# Altium PCB VALVE_MODULE_20221227.PcbDoc (part 4 of 4)
Units mm, origin at the board's own origin, x right, y up, seen from the top; angles counter-clockwise.
Board outline 260.15 x 142.01 mm, 2 copper layers (Top Layer, Bottom Layer); 455 components, 212 nets, 1302 pads, 385 vias.
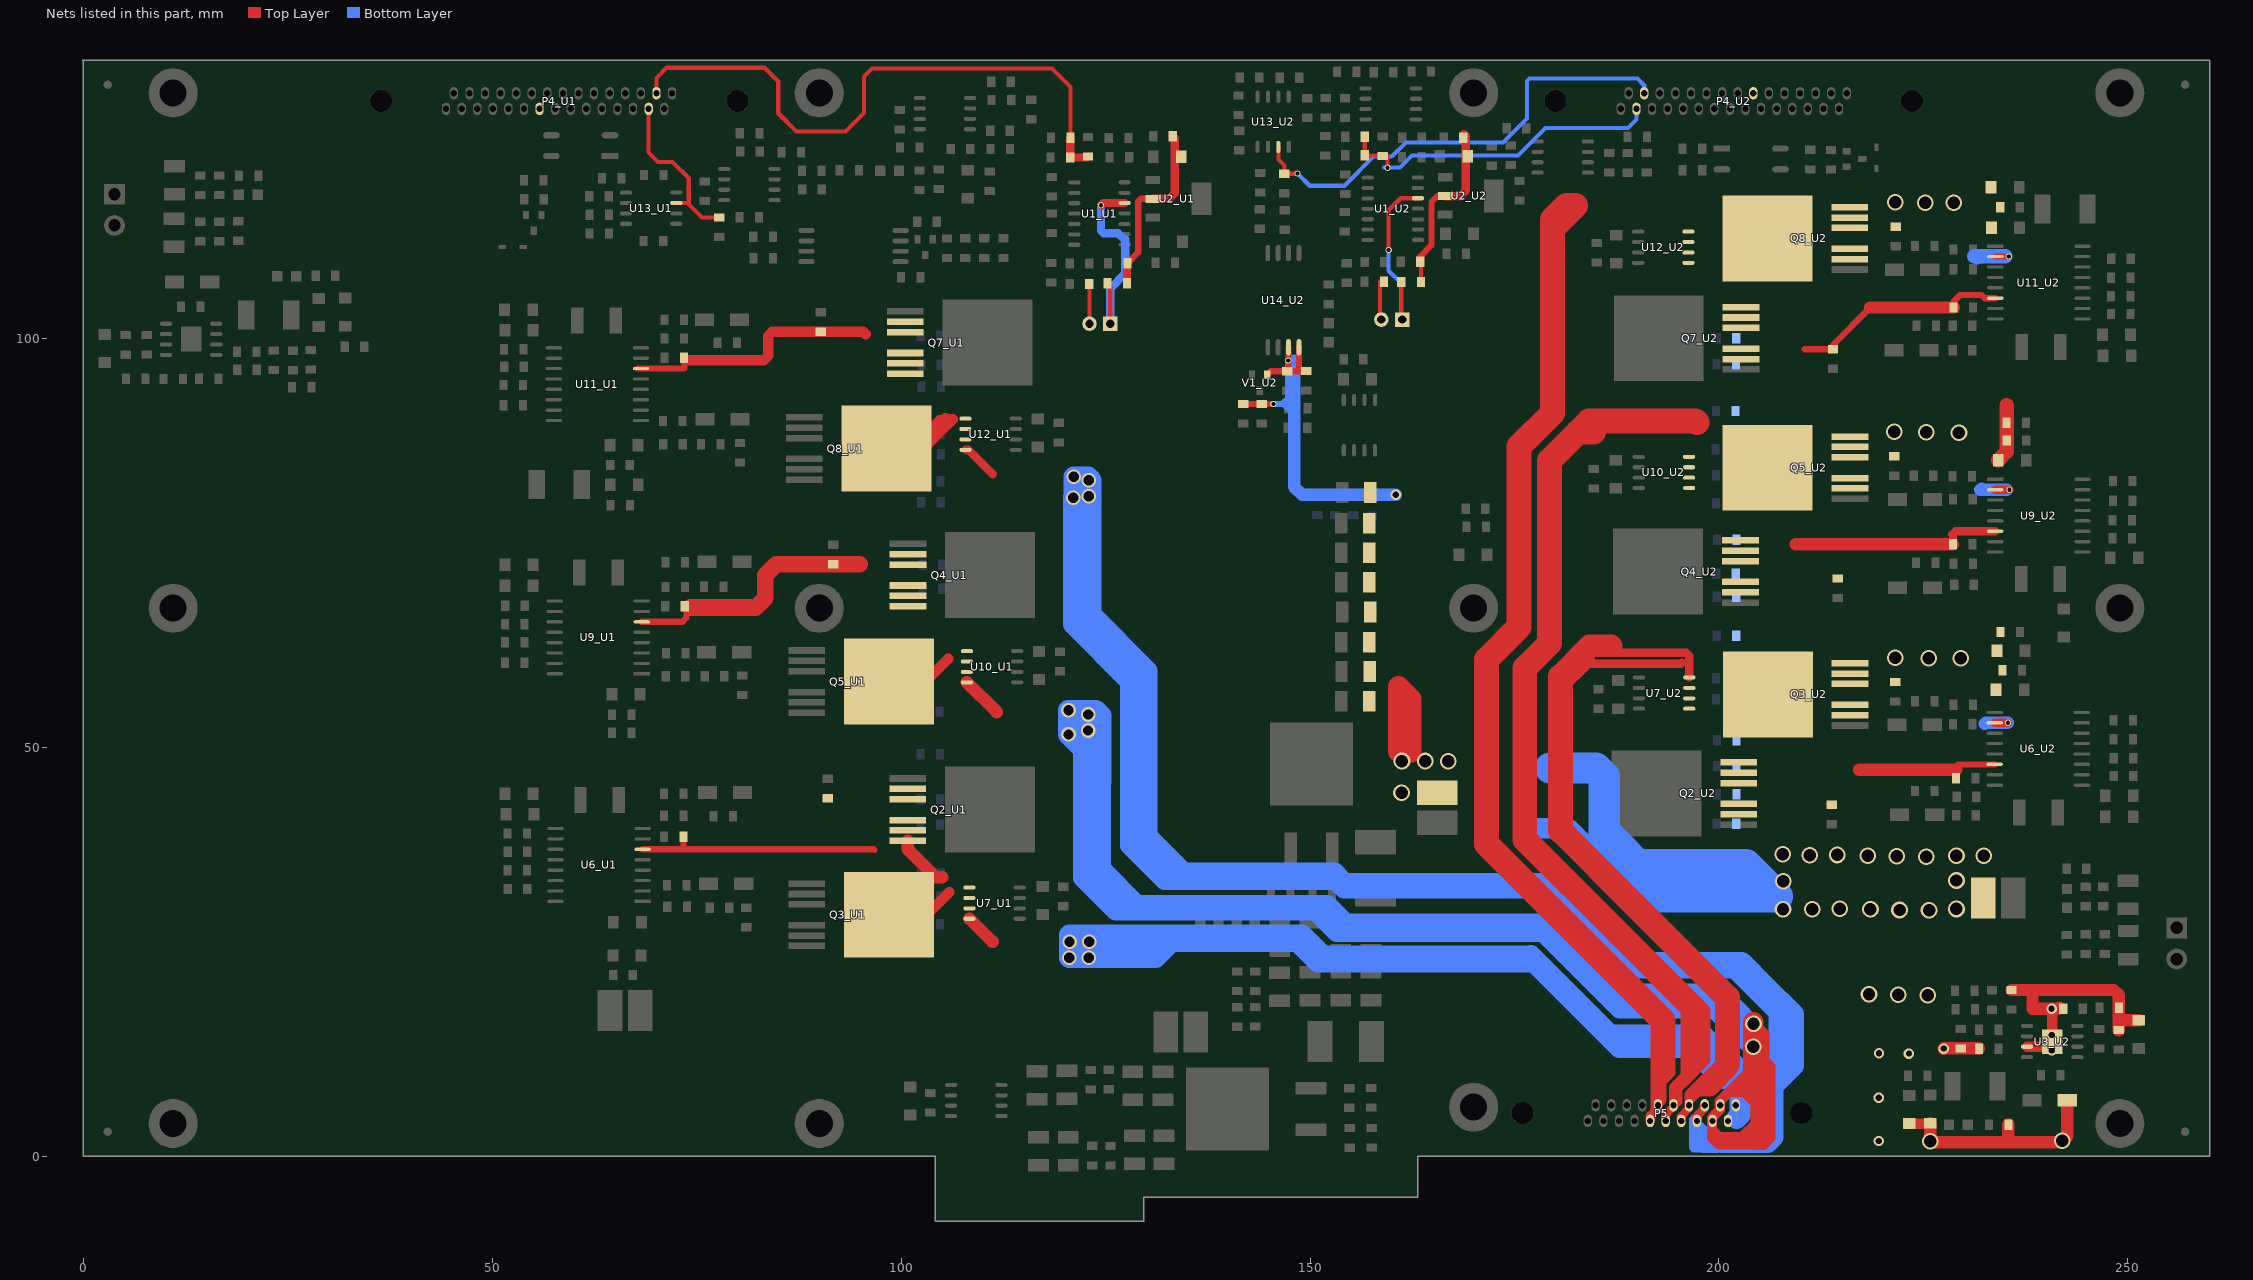
[diagram p4: the nets of this part, all layers, seen from the top]

## Via types
v1: diameter 0.762, hole 0.508, Top Layer to Bottom Layer, 142 vias
v2: diameter 2.032, hole 1.524, Top Layer to Bottom Layer, 140 vias
v3: diameter 1.27, hole 0.762, Top Layer to Bottom Layer, 77 vias
v4: diameter 1.27, hole 0.711, Top Layer to Bottom Layer, 14 vias
v5: diameter 1.778, hole 1.27, Top Layer to Bottom Layer, 12 vias

## Nets (pads, with @x,y where several pads share a name; then routed paths per layer and width w, separated by ;. In a path a pad name is that pad's centre, name@x,y a point inside that pad or via, vN(x,y) a via of type N, cw(c..) or ccw(c..) an arc to the next point about the centre after c; other vN are vias at no path point) (continued)
PGND_U2: C15_U2.2 C16_U2.2 C17_U2.2 C18_U2.2 C19_U2.2 C20_U2.2 C21_U2.2 C22_U2.2 C24_U2.2 C25_U2.1 C26_U2.1 C27_U2.1 C29_U2.1 C30_U2.1 C69_U2.1 C70_U2.2 C71_U2.2 C72_U2.2 C73_U2.2 C74_U2.2 C75_U2.2 C76_U2.2 C77_U2.2 C78_U2.2 C79_U2.2 C80_U2.2 C81_U2.2 C82_U2.2 C83_U2.2 C84_U2.2 C85_U2.2 C86_U2.2 C87_U2.2 C88_U2.2 C89_U2.2 C90_U2.2 C91_U2.2 C92_U2.2 C93_U2.2 C106_U2.2 C107_U2.2 C108_U2.2 C109_U2.2 C110_U2.2 C111_U2.2 C112_U2.2 C113_U2.2 D2_U2.1 Q3_U2.2 Q3_U2.3 Q3_U2.5 Q3_U2.6 Q3_U2.7 Q5_U2.2 Q5_U2.3 Q5_U2.5 Q5_U2.6 Q5_U2.7 Q8_U2.2 Q8_U2.3 Q8_U2.5 Q8_U2.6 Q8_U2.7 R16_U2.2 R21_U2.2 R22_U2.1 R24_U2.2 R25_U2.1 R37_U2.1 R54_U2.1 R68_U2.1 R76_U2.2 R80.2 U3_U2.7 U3_U2.9 U6_U2.2 U9_U2.2 U11_U2.2 U14_U2.3 U14_U2.4 V1_U2.1 | length 246.4
  Top Layer w0.762: C30_U2.1@141.859,91.948 C29_U2.1@144.12,91.948 145.517,91.948 145.542,91.973 v1(145.517,91.973) ; V1_U2.1@144.78,95.529 145.212,95.961 C69_U2.1@147.193,95.961 ; U14_U2.3@147.371,98.908 147.371,96.139 C69_U2.1@147.193,95.961 ; U14_U2.4@148.641,98.908 148.641,96.012 148.59,95.961 ; R76_U2.2@149.555,95.987 149.53,95.961 148.59,95.961 ; U11_U2.2@233.782,109.982 v1(235.433,109.982) ; C69_U2.1@147.193,95.961 148.59,95.961
  Top Layer w1.016: U6_U2.2@233.705,52.984 235.309,52.984 v1(235.32,52.995) ; U9_U2.2@233.782,81.483 v1(235.509,81.483)
  Top Layer w1.27: C22_U2.2@223.241,3.988 225.755,3.988 C21_U2.2@225.806,4.039 ; U3_U2.7@237.668,13.386 240.132,13.386 U3_U2.9@240.741,13.995 240.741,17.958 v3(240.665,18.034)
  Top Layer w1.524: C21_U2.2@225.806,4.039 225.806,1.829 225.933,1.702 235.356,1.702 ; v3(227.482,13.157) 227.508,13.183 R25_U2.1@229.54,13.183 231.75,13.183 C27_U2.1@231.775,13.157 ; R16_U2.2@235.382,3.861 235.382,1.727 235.356,1.702 ; R22_U2.1@235.763,20.32 237.922,20.32 ; C26_U2.1@241.605,18.161 241.478,18.034 v3(240.665,18.034) 238.328,18.034 238.328,19.914 237.922,20.32 ; D2_U2.1@242.57,6.858 242.57,2.438 241.833,1.702 235.356,1.702 ; C25_U2.1@248.869,15.418 248.869,16.535 ; C24_U2.2@251.333,16.612 248.945,16.612 248.869,16.535 ; 237.922,20.32 248.26,20.32 248.895,19.685 R24_U2.2@248.895,18.136 248.869,18.11 248.869,16.535
  Top Layer w1.778: C108_U2.2@234.137,85.09 235.204,86.157 235.204,91.796
  Top Layer w2.54: 160.807,49.479 160.807,57.429 162.331,55.905 162.331,49.378
  Bottom Layer w0.762: v1(145.517,91.973) 146.634,91.973 ; 148.057,90.627 146.71,91.973 ; 148.057,91.567 147.65,91.973 146.71,91.973 ; 148.057,97.257 148.031,97.282 v1(147.345,97.282) 147.345,92.685 146.634,91.973 ; 146.634,91.973 146.71,91.973
  Bottom Layer w1.524: 148.057,97.257 148.057,91.567 148.057,90.627 148.057,81.839 149.022,80.874 v3(160.477,80.874) ; 231.927,81.458 v1@235.204,81.458 ; 232.131,81.585 232.232,81.483 ; 232.512,52.883 232.624,52.995 v1(235.32,52.995)
  Bottom Layer w1.778: 231.216,110.033 234.975,110.033 ; 231.572,109.88 231.673,109.982
  Bottom Layer w2.54: 177.698,40.107 181.458,40.107 190.5,31.064 207.289,31.064
  Bottom Layer w3.81: 179.324,47.447 184.937,47.447 185.979,46.406 185.979,39.726 191.922,33.782 205.156,33.782 ; 190.043,35.662 203.276,35.662 207.162,31.775
  other v2: 225.831,1.829 241.986,1.88 225.501,19.685 221.894,19.736 218.338,19.812 225.679,30.048 222.072,30.099 207.823,30.175 218.516,30.175 211.404,30.201 229.032,30.226 214.782,30.251 207.848,33.63 229.032,33.706 225.349,36.627 221.742,36.678 229.032,36.728 218.186,36.754 232.359,36.754 211.074,36.779 214.452,36.83 207.797,36.906 161.188,44.45 166.878,48.285 161.239,48.311 164.109,48.311 225.654,60.858 229.54,60.858 221.564,60.96 229.337,88.468 225.349,88.519 221.412,88.57 225.222,116.561 228.702,116.561 221.564,116.611
  other v3: 219.532,1.854 219.532,7.137 223.215,12.548 219.558,12.573 240.69,12.929 240.69,14.834
PT1000_AN1_U1: P1_U1.2 R11_U1.1 | length 4.9
  Top Layer w0.508: R11_U1.1@123.012,106.629 123.038,106.604 P1_U1.2@123.038,101.778
PT1000_AN1_U2: P1_U2.2 R11_U2.1 | length 4.7
  Top Layer w0.508: R11_U2.1@158.547,106.909 158.547,102.464 P1_U2.2@158.725,102.286
PT1000_AP1_U1: P1_U1.1 R4_U1.2 U1_U1.12 | length 25.7
  Top Layer w0.508: R4_U1.2@125.247,106.731 125.578,106.401 P1_U1.1@125.578,101.778
  Top Layer w1.016: v1(124.435,116.256) 124.714,116.535 U1_U1.12@127.33,116.535
  Bottom Layer w1.016: v1(124.435,116.256) 124.435,113.182 124.79,112.827 126.543,112.827 127.254,112.116 127.406,112.116 127.406,107.925 125.578,106.096 P1_U1.1@125.578,101.778
PT1000_AP1_U2: P1_U2.1 R4_U2.2 U1_U2.12 | length 22.9
  Top Layer w0.508: v1(159.614,110.795) 159.614,115.646 161.087,117.119 U1_U2.12@163.195,117.119 ; R4_U2.2@161.163,106.883 161.163,102.387 P1_U2.1@161.265,102.286
  Bottom Layer w0.508: v1(159.614,110.795) 159.614,108.255 161.112,106.756 161.112,102.438 P1_U2.1@161.265,102.286
TEMP_U1: C12_U1.1 P4_U1.29 R5_U1.2 R9_U1.2 | length 76.1
  Top Layer w0.508: P4_U1.29@70.091,129.952 70.091,131.838 71.323,133.071 83.312,133.071 84.988,131.394 84.988,127.508 87.198,125.298 93.193,125.298 95.453,127.559 95.453,131.978 96.444,132.969 118.466,132.969 120.701,130.734 R9_U1.2@120.701,124.511
  Top Layer w1.016: R9_U1.2@120.701,124.511 120.701,122.123 R5_U1.2@120.675,122.098 122.733,122.098 C12_U1.1@122.86,122.225
TEMP_U2: C12_U2.1 P4_U2.29 R5_U2.2 R9_U2.2 | length 40.6
  Top Layer w0.508: R9_U2.2@156.693,124.638 R5_U2.2@156.693,122.352 157.836,122.352 158.826,122.352 C12_U2.1@158.902,122.276 ; v1(159.461,120.853) C12_U2.1@159.461,122.301
  Bottom Layer w0.508: 159.029,120.879 160.985,120.879 162.458,122.352 175.412,122.352 178.765,125.705 188.874,125.705 189.906,126.736 P4_U2.29@189.906,128.047
U_OUT_U1: C32_U1.2 Q2_U1.2 Q2_U1.3 Q2_U1.5 Q2_U1.6 Q2_U1.7 Q3_U1.4 R30_U1.2 U6_U1.6 U7_U1.1 U7_U1.2 | length 45.1
  Top Layer w0.762: U6_U1.6@68.402,37.516 73.508,37.516 ; C32_U1.2@73.406,39.04 73.406,37.617 73.508,37.516 ; 96.749,37.44 96.672,37.516 73.508,37.516
  Top Layer w1.27: Q3_U1.4@98.527,29.515 103.149,29.515 105.893,32.258
  Top Layer w1.524: Q2_U1.7@100.813,38.557 100.813,37.541 104.267,34.087 105.054,34.087
U_OUT_U2: C32_U2.2 Q2_U2.2 Q2_U2.3 Q2_U2.5 Q2_U2.6 Q2_U2.7 Q3_U2.4 R30_U2.2 U6_U2.6 U7_U2.1 U7_U2.2 | length 18.1
  Top Layer w0.762: C32_U2.2@228.981,46.228 228.981,47.244 228.981,47.65 229.235,47.904 U6_U2.6@233.705,47.904
  Top Layer w1.524: 217.145,47.269 217.17,47.244 228.981,47.244
UU_OUT1: P5.1 P5.11 U7_U1.3 U7_U1.4 | length 205.1
  Top Layer w1.524: U7_U1.4@108.356,29.032 111.15,26.238 111.227,26.238
  Bottom Layer w2.54: v5(122.961,24.257) v5@122.987,24.282 ; 176.987,24.536 186.944,14.58 ; 187.046,14.808 197.968,14.808 201.371,11.405 201.651,11.405 202.565,10.49 202.565,8.509 ; 202.159,4.597 202.565,5.004 202.565,8.509 ; v5(120.599,26.238) 133.071,26.238 ; v5(120.599,26.238) 120.599,24.308 v5(120.574,24.282) 131.115,24.282 133.071,26.238 ; v5(120.599,26.238) 120.599,27.076 149.022,27.076 151.587,24.511 176.581,24.511 177.343,23.749 ; 133.071,26.238 148.463,26.238 150.952,23.749 177.343,23.749 ; 177.343,23.749 187.833,13.259 196.596,13.259 200.355,9.5 201.574,9.5 202.565,8.509
  other v5: 122.987,26.213
UU_OUT2: P5.4 P5.14 U7_U2.3 U7_U2.4 | length 123.6
  Top Layer w1.016: 181.458,54.839 181.458,57.709 183.96,60.211 ; P5.14@195.332,4.318 195.332,4.858 196.285,5.81 196.285,6.223 P5.4@196.285,6.649 ; 195.453,60.35 195.313,60.211 183.96,60.211 ; U7_U2.4@196.367,58.522 196.367,61.163 195.961,61.57 183.617,61.57 184.353,60.833 184.353,60.604 183.96,60.211 ; 197.383,7.747 P5.4@196.285,6.649 ; 198.298,8.661 197.46,7.823 198.755,7.823 ; 198.857,9.246 198.603,9.246 197.79,8.433 197.104,8.433 ; 201.016,11.405 200.076,11.405 197.104,8.433 ; P5.4@196.285,6.649 196.285,7.614 197.104,8.433
  Top Layer w2.54: 183.185,61.138 183.185,60.427 180.721,57.963 180.721,59.03 184.175,62.484 ; 184.226,62.433 184.175,62.484 ; 186.919,62.382 186.817,62.484 184.175,62.484 ; 198.831,8.585 200.99,10.744
  Top Layer w3.048: 180.645,58.623 180.645,39.776 189.586,30.836 ; 189.916,30.505 189.586,30.836 ; 201.016,11.405 201.016,19.406 189.586,30.836
V_OUT_U1: C47_U1.1 Q4_U1.2 Q4_U1.3 Q4_U1.5 Q4_U1.6 Q4_U1.7 Q5_U1.4 R47_U1.1 U9_U1.6 U10_U1.1 U10_U1.2 | length 40.2
  Top Layer w0.762: U9_U1.6@68.301,65.329 73.279,65.329 73.762,65.811 73.762,67.031 C47_U1.1@73.558,67.234 ; 94.945,72.365 95.199,72.111
  Top Layer w1.27: Q5_U1.4@98.857,58.014 102.946,58.014 105.766,60.833
  Top Layer w2.032: 74.219,67.081 82.245,67.081 83.414,68.25 83.414,71.044 84.734,72.365 R47_U1.1@91.694,72.365 94.945,72.365
V_OUT_U2: C47_U2.1 Q4_U2.2 Q4_U2.3 Q4_U2.5 Q4_U2.6 Q4_U2.7 Q5_U2.4 R47_U2.1 U9_U2.6 U10_U2.1 U10_U2.2 | length 26.2
  Top Layer w0.762: 209.118,74.574 209.372,74.828
  Top Layer w1.016: C47_U2.1@228.6,74.828 228.6,75.895 228.498,75.997 228.905,76.403 U9_U2.6@233.782,76.403
  Top Layer w1.524: 209.372,74.828 C47_U2.1@228.6,74.828
VAL_CTRL_U1: P4_U1.7
VAL_CTRL_U2: P4_U2.7
VDC1_U1: P4_U1.14 R77_U1.2 U13_U1.7 | length 20.6
  Top Layer w0.508: P4_U1.14@69.139,128.047 69.139,122.707 70.282,121.564 72.06,121.564 74.041,119.583 74.041,116.51 ; U13_U1.7@72.517,116.535 73.889,116.535 75.641,114.783 R77_U1.2@77.775,114.783
VDC1_U2: P4_U2.14 R77_U2.2 U13_U2.7 | length 57.6
  Top Layer w0.508: U13_U2.7@146.126,123.393 146.126,121.869 146.863,121.133 R77_U2.2@146.863,120.117 148.438,120.117 v1(148.463,120.142)
  Bottom Layer w0.508: v1(148.463,120.142) 149.962,118.643 154.203,118.643 157.785,122.225 159.995,122.225 161.722,123.952 173.609,123.952 176.53,126.873 176.53,131.445 176.835,131.75 190.017,131.75 190.858,130.909 P4_U2.14@190.858,129.952
VREF_2V5_U1: C2_U1.1 C3_U1.1 R3_U1.1 R4_U1.1 U2_U1.2 | length 22.5
  Top Layer w0.762: R3_U1.1@127.686,109.169 129.007,110.49 129.007,116.738 129.311,117.043 U2_U1.2@130.785,117.043
  Top Layer w1.016: R4_U1.1@127.635,106.731 127.635,109.118 R3_U1.1@127.686,109.169 ; U2_U1.2@130.785,117.043 132.766,117.043 133.452,117.729 133.452,124.46 C3_U1.1@133.223,124.689
VREF_2V5_U2: C2_U2.1 C3_U2.1 R3_U2.1 R4_U2.1 U2_U2.2 | length 22.1
  Top Layer w0.508: R3_U2.1@163.474,109.347 163.551,109.271 R4_U2.1@163.551,106.883
  Top Layer w0.762: R3_U2.1@163.474,109.347 163.474,109.982 164.846,111.354 164.846,116.653 165.566,117.373 U2_U2.2@166.522,117.373
  Top Layer w1.016: U2_U2.2@166.522,117.373 168.326,117.373 169.037,118.085 169.037,124.739 C3_U2.1@168.808,124.968
VV_OUT1: P5.2 P5.12 U10_U1.3 U10_U1.4 | length 353.3
  Top Layer w1.27: 202.59,8.23 204.013,9.652 ; 203.429,10.058 203.022,9.652 ; 203.556,10.236 v2@203.556,15.443 ; v2@204.165,16.358 204.191,16.332 205.537,14.986 205.537,11.709 206.273,10.973 206.273,9.627 ; 204.191,9.652 204.013,9.652 ; 204.47,9.373 204.47,8.966 ; 205.588,9.83 205.588,9.677 ; 205.969,9.627 206.273,9.322 ; 199.142,2.305 200.05,2.305 ; 199.142,2.305 199.142,3.213 ; 199.142,2.305 200,1.448 204.445,1.448 ; 199.142,3.213 200.05,2.305 ; 199.142,3.213 199.142,4.318 199.142,4.731 200.095,5.683 200.095,6.223 200.095,6.725 201.244,7.874 ; 200.05,2.305 202.794,2.305 ; 201.244,7.874 203.022,9.652 ; 201.244,7.874 203.098,7.874 ; 202.794,2.305 204.184,2.305 205.334,3.454 ; 202.794,2.305 204.47,3.981 204.47,6.502 ; 203.022,9.652 204.013,9.652 ; 203.098,7.874 203.86,7.874 ; 203.098,7.874 204.47,6.502 ; 203.86,7.874 204.47,7.874 ; 203.86,7.874 204.47,7.264 ; 204.013,9.652 204.191,9.83 204.191,11.709 206.273,9.627 ; 204.445,1.448 204.47,1.422 205.461,1.422 206.273,2.235 206.273,9.322 ; 204.445,1.448 205.334,2.337 205.334,3.454 ; 204.47,6.502 204.47,7.264 ; 204.47,7.264 205.334,6.401 ; 204.47,7.264 204.47,7.874 ; 204.47,7.874 205.207,7.874 ; 204.47,7.874 204.47,8.966 ; 204.47,8.966 204.876,8.966 205.588,9.677 ; 205.207,7.874 205.588,8.255 205.588,9.677 ; 205.207,7.874 205.334,7.747 205.334,6.401 ; 205.334,3.454 205.334,6.401 ; 206.273,9.322 206.273,9.627
  Top Layer w1.524: U10_U1.4@108.052,57.937 111.709,54.28
  Top Layer w2.54: 204.191,9.83 204.191,9.652 ; 204.191,11.709 v2(204.191,13.386) v2@204.191,16.332 ; 204.47,7.874 204.191,8.153 204.191,9.246 ; 204.47,8.966 204.191,9.246 ; 204.876,8.966 204.47,9.373 204.191,9.652 ; 204.191,9.246 204.191,9.652
  Bottom Layer w2.54: v5(122.86,52.045) v5@122.885,52.07 ; 197.879,19.672 202.717,14.834 ; v2@204.178,13.373 202.997,14.554 ; v2(204.191,13.386) 204.191,15.697 202.997,16.891 ; v5(120.472,51.562) v5@123.444,51.562 ; v5(120.472,51.562) 122.301,49.733 122.301,34.061 124.384,31.979 ; v5(120.472,51.562) v5(120.472,54.534) ; v5(120.472,54.534) 123.8,54.534 124.46,53.873 124.46,45.745 124.384,45.669 ; v5(120.472,54.534) v5@123.444,51.562 ; v5@123.444,51.562 124.257,50.749 124.384,50.749 ; v5@123.444,51.562 123.571,51.562 124.384,50.749 ; 124.384,31.979 124.384,35.103 ; 124.384,31.979 126.263,30.099 150.647,30.099 ; 124.384,35.103 128.803,30.683 152.07,30.683 154.33,28.423 ; 124.384,35.103 124.384,45.669 ; 124.384,45.669 124.384,50.749 ; 150.647,30.099 153.264,27.483 153.899,27.483 ; 150.647,30.099 151.282,30.099 152.959,28.423 ; 152.959,28.423 154.33,28.423 ; 152.959,28.423 153.899,27.483 ; 153.899,27.483 178.511,27.483 ; 154.33,28.423 178.181,28.423 179.121,27.483 ; 178.511,27.483 187.909,18.085 201.803,18.085 202.717,17.17 ; 178.511,27.483 179.121,27.483 ; 179.121,27.483 186.741,19.863 200.127,19.863 202.717,17.272 202.717,17.17 ; 202.717,14.834 202.717,17.17 ; 202.717,14.834 202.997,14.554 ; 202.717,17.17 202.997,16.891 ; 202.997,14.554 202.997,16.891
  other v2: 204.216,16.205
  other v5: 122.885,54
VV_OUT2: P5.5 P5.15 U10_U2.3 U10_U2.4 | length 141.4
  Top Layer w1.016: P5.15@193.427,4.318 193.427,5.068 P5.5@194.38,6.021 ; 196.799,12.243 196.317,11.76 ; 196.799,14.173 195.809,13.183 195.809,11.252 ; 196.799,18.186 198.476,16.51 ; 197.18,19.228 198.476,17.932 198.476,16.51 ; P5.5@194.38,6.021 195.008,6.649 195.008,8.217 ; P5.5@194.38,6.021 194.38,6.223 194.38,7.588 ; 194.38,7.588 195.008,8.217 ; 194.38,7.588 194.38,8.452 195.809,9.881 195.809,11.252 ; 195.008,8.217 196.317,9.525 ; 195.809,11.252 196.317,11.76 ; 196.317,9.525 198.476,11.684 198.476,12.065 ; 196.317,9.525 196.317,9.906 ; 196.317,9.906 196.317,11.76 ; 196.317,9.906 198.476,12.065 ; 198.476,12.065 198.476,16.51
  Top Layer w3.048: 182.778,88.544 184.633,88.544 ; 187.909,27.076 187.731,27.254 ; 196.799,12.243 196.799,14.173 196.799,18.186 187.731,27.254 ; 197.307,89.687 197.104,89.891 184.125,89.891 179.299,85.065 179.299,62.713 176.251,59.665 176.251,38.735 187.731,27.254
W_OUT_U1: C54_U1.1 Q7_U1.2 Q7_U1.3 Q7_U1.5 Q7_U1.6 Q7_U1.7 Q8_U1.4 R62_U1.1 U11_U1.6 U12_U1.1 U12_U1.2 | length 47.3
  Top Layer w0.762: U11_U1.6@67.767,96.291 73.431,96.291 73.533,96.393 73.533,97.409 C54_U1.1@73.457,97.485
  Top Layer w1.27: C54_U1.1@73.66,97.333 83.185,97.333 83.744,97.892 83.744,100.279 84.252,100.787 R62_U1.1@90.17,100.787 95.377,100.787 95.682,100.482 ; Q8_U1.4@98.222,86.512 Q8_U1.4@101.295,86.512 ; 104.75,89.967 Q8_U1.4@101.295,86.512 ; 105.41,90.246 105.537,90.119 106.299,90.119 102.692,86.512 Q8_U1.4@101.295,86.512
W_OUT_U2: C54_U2.1 Q7_U2.2 Q7_U2.3 Q7_U2.5 Q7_U2.6 Q7_U2.7 Q8_U2.4 R62_U2.1 U11_U2.6 U12_U2.1 U12_U2.2 | length 26.9
  Top Layer w0.762: 210.49,98.654 R62_U2.1@213.944,98.654 213.944,99.187 218.516,103.759 ; C54_U2.1@228.676,103.759 228.676,104.496 229.464,105.283 232.105,105.283 232.486,104.902 U11_U2.6@233.782,104.902
  Top Layer w1.524: 218.516,103.759 C54_U2.1@228.676,103.759
WW_OUT1: P5.3 P5.13 U12_U1.3 U12_U1.4 | length 361.7
  Top Layer w1.016: U12_U1.4@107.874,86.36 108.229,86.36 111.227,83.363 ; P5.13@197.237,4.318 197.237,4.832 198.19,5.785 P5.3@198.19,6.223
  Bottom Layer w1.016: 197.891,1.829 197.409,2.311 P5.13@197.409,4.002 ; P5.3@198.19,6.223 198.19,5.836 P5.13@197.409,5.055 ; P5.13@196.85,3.931 196.85,4.496 P5.13@197.409,5.055 ; P5.13@196.85,3.931 196.85,1.067 196.952,0.965 199.695,0.965 200.406,1.676 199.734,1.676 P5.13@197.409,4.002 ; P5.13@196.85,3.931 197.237,4.318 197.237,4.173 P5.13@197.409,4.002 ; P5.13@197.409,4.002 P5.13@197.409,5.055
  Bottom Layer w2.54: v5(121.056,80.518) 121.056,65.049 128.067,58.039 128.067,38.024 132.283,33.807 153.797,33.807 ; v5(121.107,83.058) 121.107,80.569 121.26,80.721 121.26,83.058 122.86,83.058 123.266,82.652 123.266,66.167 130.073,59.36 130.073,39.116 134.569,34.62 152.984,34.62 153.797,33.807 ; v5(122.936,80.67) v5@122.961,80.696 ; 188.468,23.495 190.805,23.673 ; 197.714,2.261 197.891,2.083 197.891,1.829 198.044,1.676 199.734,1.676 ; 200.406,1.676 204.064,1.676 ; 153.797,33.172 154.432,33.172 ; 153.797,33.172 154.178,32.791 154.813,32.791 ; 153.797,33.172 153.949,33.325 154.28,33.325 ; 153.797,33.172 153.797,33.807 ; 153.797,33.807 154.28,33.325 ; 154.28,33.325 178.689,33.325 ; 154.28,33.325 154.432,33.172 ; 154.432,33.172 154.813,32.791 ; 154.432,33.172 157.937,33.172 158.318,32.791 ; 154.813,32.791 158.318,32.791 ; 158.318,32.791 178.689,32.791 ; 178.689,32.791 179.172,32.791 181.305,30.658 ; 178.689,32.791 178.689,33.325 ; 178.689,32.791 178.689,32.69 181.305,30.074 ; 178.689,33.325 181.305,30.709 181.305,30.658 ; 181.305,30.074 188.366,23.012 191.287,23.012 ; 181.305,30.074 181.305,30.658 ; 181.305,30.658 188.29,23.673 190.805,23.673 ; 190.805,23.673 191.287,23.19 191.287,23.012 ; 190.805,23.673 202.794,23.673 205.715,20.752 ; 191.287,23.012 201.93,23.012 205.715,19.228 ; 204.064,1.676 205.918,1.676 206.604,2.362 206.604,4.216 ; 204.064,1.676 205.638,3.251 ; 205.638,3.251 206.604,4.216 ; 205.638,3.251 205.638,10.363 207.315,12.04 ; 205.715,19.228 207.315,17.628 207.315,12.04 ; 205.715,19.228 205.715,20.752 ; 205.715,20.752 209.093,17.374 209.093,11.049 207.315,9.271 ; 206.604,4.216 206.604,8.56 207.315,9.271 ; 207.315,9.271 207.315,12.04
  other v5: 122.961,82.626
WW_OUT2: P5.6 P5.16 U12_U2.3 U12_U2.4 | length 146.3
  Top Layer w1.016: 192.145,11.398 192.145,5.582 ; 193.167,10.973 192.475,10.281 192.475,8.452 ; 194.177,12.465 194.177,10.154 193.078,9.055 ; 191.745,5.182 192.145,5.582 ; 191.745,5.182 191.522,4.959 191.522,4.318 191.745,4.54 191.745,5.182 ; 192.145,5.582 192.475,5.912 P5.6@192.475,6.223 ; P5.6@192.475,6.223 193.078,6.826 193.078,9.055 ; P5.6@192.475,6.223 192.475,8.452 ; 192.475,8.452 193.078,9.055
  Top Layer w3.048: 179.629,112.776 179.629,90.83 175.565,86.766 175.565,64.694 171.577,60.706 171.577,38.176 186.487,23.266 ; 187.617,22.136 186.487,23.266 ; 193.167,10.973 193.167,16.586 186.487,23.266 ; 179.629,113.386 179.629,114.503 181.356,116.23 182.474,116.23 179.629,113.386
pads on no net: P4_U1. P4_U1.9 P4_U1.10 P4_U1.22 P4_U1.24 P4_U1.25 P4_U2. P4_U2.9 P4_U2.10 P4_U2.22 P4_U2.24 P4_U2.25 P5. U1_U1.5 U1_U1.6 U1_U1.7 U1_U2.5 U1_U2.6 U1_U2.7 U2_U1.4 U2_U2.4 U5_U1.6 U5_U2.6 U6_U1.4 U6_U1.5 U6_U1.9 U6_U1.10 U6_U1.16 U6_U2.4 U6_U2.5 U6_U2.9 U6_U2.10 U6_U2.16 U7_U1.6 U7_U2.6 U9_U1.4 U9_U1.5 U9_U1.9 U9_U1.10 U9_U1.16 U9_U2.4 U9_U2.5 U9_U2.9 U9_U2.10 U9_U2.16 U10_U1.6 U10_U2.6 U11_U1.4 U11_U1.5 U11_U1.9 U11_U1.10 U11_U1.16 U11_U2.4 U11_U2.5 U11_U2.9 U11_U2.10 U11_U2.16 U12_U1.6 U12_U2.6

## Polygon pours and split planes (outlines as drawn)
PGND_U2 on Top Layer "Top Layer-No Net" (solid, remove dead copper, pour order 13): 217.322,20.991 217.322,0.086 217.373,0.036 244.653,0.036 244.653,21.016 244.704,21.067 244.653,21.016 217.399,21.016
PGND_U1 on Top Layer "Top Layer-No Net" (solid, remove dead copper, pour order 11): -0.102,108.382 0,108.28 0,73.711 35.56,73.711 35.535,73.736 35.535,108.28 0.025,108.28 0,108.306
AGND_U1 on Top Layer "Top Layer-No Net" (solid, remove dead copper, pour order 6): 63.5,133.985 63.5,112.09 87.579,112.09 87.681,111.989 87.732,112.039 90.983,112.039 90.983,114.91 91.135,115.062 94.336,118.262 94.336,118.491 113.817,118.491 116.281,116.027 117.399,116.027 117.399,106.985 117.932,106.451 118.593,105.791 127.229,105.791 137.795,105.791 137.998,105.588 138.151,105.74 138.151,133.985 95.961,133.985 95.758,134.188 95.123,133.553 95.123,125.451 84.684,125.451 84.633,125.4 84.633,133.985 63.5,133.985
AGND_U2 on Top Layer "Top Layer-No Net" (solid, remove dead copper, pour order 8): 140.995,133.987 140.995,112.89 144.374,109.512 144.704,109.182 153.391,109.182 153.391,91.884 153.924,91.351 154.051,91.224 158.623,91.224 158.623,106.057 158.547,106.134 158.547,108.318 171.628,108.318 171.679,108.267 173.279,109.867 173.279,114.287 173.533,114.287 178.918,119.672 179.172,119.926 199.187,119.926 199.187,133.642 199.39,133.845 199.248,133.987 175.209,133.987 175.209,125.946 175.26,125.895 175.006,126.149 164.846,126.149 164.846,133.911 164.922,133.987 140.995,133.987
AGND_U1 on Bottom Layer "Top Layer-No Net" (solid, remove dead copper, pour order 5): 63.57,133.964 63.57,112.069 87.65,112.069 87.751,111.968 87.802,112.018 91.053,112.018 91.053,114.889 91.206,115.041 94.406,118.241 94.406,118.47 113.888,118.47 116.352,116.006 117.469,116.006 117.469,106.964 118.003,106.43 118.663,105.77 127.299,105.77 137.865,105.77 138.069,105.567 138.221,105.719 138.221,133.964 96.032,133.964 95.828,134.167 95.193,133.532 95.193,125.43 84.754,125.43 84.703,125.379 84.703,133.964 63.57,133.964
AGND_U2 on Bottom Layer "Top Layer-No Net" (solid, remove dead copper, pour order 7): 141.07,133.702 141.07,112.605 144.448,109.227 144.778,108.897 153.465,108.897 153.465,91.6 153.998,91.066 154.125,90.939 158.697,90.939 158.697,105.773 158.621,105.849 158.621,108.033 171.702,108.033 171.753,107.983 173.353,109.583 173.353,114.002 173.607,114.002 178.992,119.387 179.246,119.641 199.261,119.641 199.261,133.357 199.464,133.56 199.322,133.702 175.284,133.702 175.284,125.661 175.334,125.61 175.08,125.864 164.92,125.864 164.92,133.626 164.997,133.702 141.07,133.702

## Keep-outs
Keep-Out Layer:
  lines w0.254: -0.003,3 ccw(c2.997,3) 2.997,0 104.2,0 104.2,-8.001 129.7,-8.001 129.7,-5 ; 0,3 0,130.988 cw(c3,130.988) 3,133.988 ; 3,134 256.997,134 ; 129.692,-5 163.2,-5 163.2,0 256.997,0 ccw(c256.997,3) 259.997,3 ; 257,134.01 cw(c257,131.01) 260,131.01 260,2.972

## Other copper
Top Layer:
  rectangle net ISO_+15V_U2: 214.986,124.663 220.675,131.445
  rectangle net ISO_GND_U1: 7.645,118.948 19.71,123.749
  rectangle net NetC21_U1_1: 24.968,97.866 32.868,102.184
  rectangle net NetC13_U1_1: 15.392,101.346 21.006,105.004
  rectangle net ISO_+15V_U1: 9.525,113.513 19.812,118.364
  rectangle net HVCC_U2: 162.027,84.557 172.771,96.723
  rectangle net HVCC_U2: 156.388,83.795 172.771,87.452
  rectangle net PGND_U2: 159.791,42.951 168.021,61.163
  rectangle net PGND_U2: 206.299,28.931 233.832,39.014
  rectangle net HVCC_U2: 166.649,94.92 177.19,105.74
  rectangle net HVCC_U2: 166.675,92.05 177.19,96.19
  rectangle net PGND_U2: 156.743,42.901 165.633,83.109
  rectangle net UU_OUT2: 184.76,59.792 199.288,63.805
  rectangle net UU_OUT2: 194.767,56.896 199.288,63.144
  rectangle net U_OUT_U2: 194.945,51.283 201.066,56.363
  rectangle net VV_OUT2: 183.363,86.944 198.831,91.034
  rectangle net VV_OUT2: 194.97,83.922 198.857,90.957
  rectangle net V_OUT_U2: 194.97,78.435 202.971,83.261
  rectangle net WW_OUT2: 181.356,114.681 198.45,117.831
  rectangle net WW_OUT2: 194.869,111.404 198.526,117.831
  rectangle net W_OUT_U2: 194.945,106.477 202.819,110.846
  rectangle net HVCCIN_U2: 144.983,44.552 155.55,87.401
  rectangle net U_OUT_U2: 207.899,42.139 219.862,49.124
  rectangle net PGND_U2: 213.639,53.492 219.456,61.976
  rectangle net PGND_U2: 213.639,57.023 234.975,64.516
  rectangle net PGND_U2: 217.526,84.607 235.661,92.786
  rectangle net PGND_U2: 213.69,81.255 219.456,92.812
  rectangle net V_OUT_U2: 207.239,69.367 218.516,76.429
  rectangle net W_OUT_U2: 211.582,98.12 219.177,105.156
  rectangle net PGND_U2: 216.992,112.319 234.95,117.78
  rectangle net PGND_U2: 213.69,109.245 219.304,117.805
  rectangle net W_OUT_U2: 200.025,97.028 211.963,117.907
  rectangle net V_OUT_U2: 200.228,68.529 211.455,89.865
  rectangle net U_OUT_U2: 200.025,41.275 211.455,61.874
  rectangle net HVCC_IN_U2: 151.892,34.468 160.553,40.615
  rectangle net HVCC_IN: 135.763,27.737 164.744,30.886
  rectangle net HVCCIN_U1: 110.947,1.6 115.875,6.401
  rectangle net PGND: 134.518,12.979 145.39,16.637
  rectangle net PGND: 134.518,13.31 139.395,22.809
  rectangle net PGND: 134.518,21.387 158.801,26.899
  rectangle net HVCC_IN: 156.032,11.201 183.718,19.152
  rectangle net HVCC_IN: 140.157,17.475 166.827,20.041
  rectangle net WW_OUT1: 108.941,79.426 123.876,84.099
  rectangle net WW_OUT1: 105.613,79.426 109.753,87.986
  rectangle net VV_OUT1: 105.766,50.521 123.901,55.626
  rectangle net VV_OUT1: 105.766,51.664 109.55,59.461
  rectangle net UU_OUT1: 106.477,23.241 123.901,27.153
  rectangle net UU_OUT1: 106.045,23.241 109.652,30.709
  rectangle net PGND_U1: 82.245,77.521 90.5,89.332
  rectangle net PGND_U1: 66.675,77.521 82.804,85.623
  rectangle net PGND_U1: 82.525,49.835 90.78,60.909
  rectangle net PGND_U1: 66.548,49.86 83.083,57.201
  rectangle net PGND_U1: 67.208,12.167 83.21,28.778
  rectangle net PGND_U1: 82.652,21.412 90.907,32.487
  rectangle net PGND_U1: 109.068,-2.464 133.579,0.025
  rectangle net PGND_U1: 118.948,10.566 133.883,17.729
  rectangle net W_OUT_U1: 83.058,96.672 93.675,101.549
  rectangle net U_OUT_U1: 89.23,38.786 93.751,44.653
  rectangle net U_OUT_U1: 72.873,37.338 93.243,39.954
  rectangle net W_OUT_U1: 97.739,88.595 108.61,92.786
  rectangle net V_OUT_U1: 99.543,60.02 109.474,64.465
  rectangle net U_OUT_U1: 99.695,31.217 109.652,35.408
  rectangle net W_OUT_U1: 92.989,88.849 102.946,102.464
  rectangle net V_OUT_U1: 94.209,57.455 103.175,74.016
  rectangle net U_OUT_U1: 92.939,26.848 103.2,45.364
  rectangle net HVCC_U1: 105.131,10.592 114.148,15.088
  rectangle net HVCC_U1: 110.846,7.01 114.148,14.707
  rectangle net HVCCIN_U1: 115.341,0.762 138.862,8.636
  rectangle net NetQ1_U1_1: 148.158,2.464 158.471,6.375
  rectangle net HVCC_IN_U1: 146.101,7.315 158.496,10.363
  rectangle net HVCC_IN_U1: 146.101,7.341 152.832,16.612
  rectangle net ISO_GND_U1: 37.389,13.132 65.862,20.371
  rectangle net ISO_GND_U1: 37.44,17.882 44.069,103.124
  rectangle net ISO_GND_U1: 41.021,18.237 52.375,45.364
  rectangle net ISO_GND_U1: 48.59,88.036 52.121,104.343
  rectangle net ISO_GND_U1: 48.438,55.677 52.299,73.355
  rectangle net ISO_+15V_U2: 241.63,26.518 259.563,31.09
  rectangle net ISO_GND_U2: 239.268,22.682 257.099,25.502
  rectangle net NetC13_U2_1: 235.356,5.969 238.43,12.446
  rectangle net NetC13_U2_1: 232.918,5.969 236.55,11.43
  rectangle net PGND_U2: 238.912,12.268 242.341,20.828
  rectangle net ISO_+15VD_U2: 235.991,112.446 240.589,119.304
  rectangle net ISO_+15V_U2: 254.051,29.743 259.309,116.865
  rectangle net ISO_GND_U2: 234.29,22.682 240.36,37.719
  rectangle net PGND_U2: 217.246,18.237 226.39,31.064
  rectangle net ISO_GND_U2: 249.961,40.589 253.314,55.753
  rectangle net ISO_GND_U2: 249.86,72.39 253.416,84.76
  rectangle net ISO_GND_U2: 249.352,96.774 253.263,112.014
  rectangle net PGND_U1: 11.963,94.005 14.757,100.787
  rectangle net NetC13_U1_1: 13.97,102.87 20.98,108.407
  rectangle net ISO_GND_U2: 244.246,32.283 251.308,36.728
  pour cut-out: 18.796,105.867 18.669,105.74 18.669,99.847 26.746,99.847 26.721,99.873 26.721,105.842 18.72,105.842
Bottom Layer:
  rectangle net PGND_U1: 1.473,73.736 35.56,108.356
  rectangle net PGND_U2: 183.871,35.839 188.595,46.812
  rectangle net PGND_U2: 156.87,38.557 184.556,49.403
  rectangle net HVCC_U2: 190.17,39.7 200.279,52.273
  rectangle net PGND_U2: 206.324,28.931 233.807,34.442
  rectangle net PGND_U2: 201.6,28.905 233.832,117.729
  rectangle net HVCC_U2: 174.904,86.995 187.452,105.74
  rectangle net HVCC_U2: 186.715,49.987 200.228,105.816
  rectangle net PGND: 179.172,2.718 186.588,10.643
  rectangle net PGND: 136.728,1.321 165.379,12.243
  rectangle net PGND: 145.466,10.109 176.327,18.898
  rectangle net PGND: 134.544,1.321 148.006,23.774
  rectangle net PGND_U1: 94.336,59.055 102.184,75.209
  rectangle net PGND_U1: 67.183,58.826 85.623,82.22
  rectangle net PGND_U1: 67.107,72.542 102.184,103.505
  rectangle net PGND_U1: 67.183,8.992 102.26,62.484
  rectangle net PGND_U1: 94.59,1.219 113.03,9.627
  rectangle net PGND_U1: 105.435,-2.464 126.568,9.627
  rectangle net PGND_U1: 119.024,-2.489 129.921,17.704
  rectangle net HVCC_U1: 105.029,10.541 116.942,103.454
  rectangle net ISO_GND_U1: 7.645,110.033 44.704,123.8
  rectangle net ISO_GND_U1: 37.414,13.233 44.679,123.647
  rectangle net ISO_GND_U1: 37.465,13.233 52.426,45.187
  rectangle net ISO_GND_U1: 39.218,88.036 50.089,97.968
  rectangle net ISO_GND_U1: 41.656,55.651 49.962,73.355
  rectangle net +5VA_U1: 119.812,91.694 135.712,93.955
  rectangle net AGND_U1: 123.012,87.376 138.532,91.186
  rectangle net PGND_U2: 217.221,0.533 244.577,21.006
  rectangle net ISO_GND_U2: 238.938,22.784 253.162,37.668
  rectangle net ISO_GND_U2: 238.912,30.836 259.182,37.897
  rectangle net ISO_GND_U2: 253.721,31.013 259.385,123.52
  rectangle net ISO_GND_U2: 248.945,72.415 256.464,123.495
  rectangle net ISO_GND_U2: 245.796,36.093 255.219,62.281
  rectangle net ISO_GND_U2: 225.933,127.178 244.526,133.325

## Text inside footprints (layer, text, board x,y; h text height)
P5: Bottom Overlay "1" at 204.438,4.635 h1 r180; Bottom Overlay "11" at 204.184,6.54 h1 r180